# EAGLE board MAIN BOARD fat outline (EAGLE 5.11)
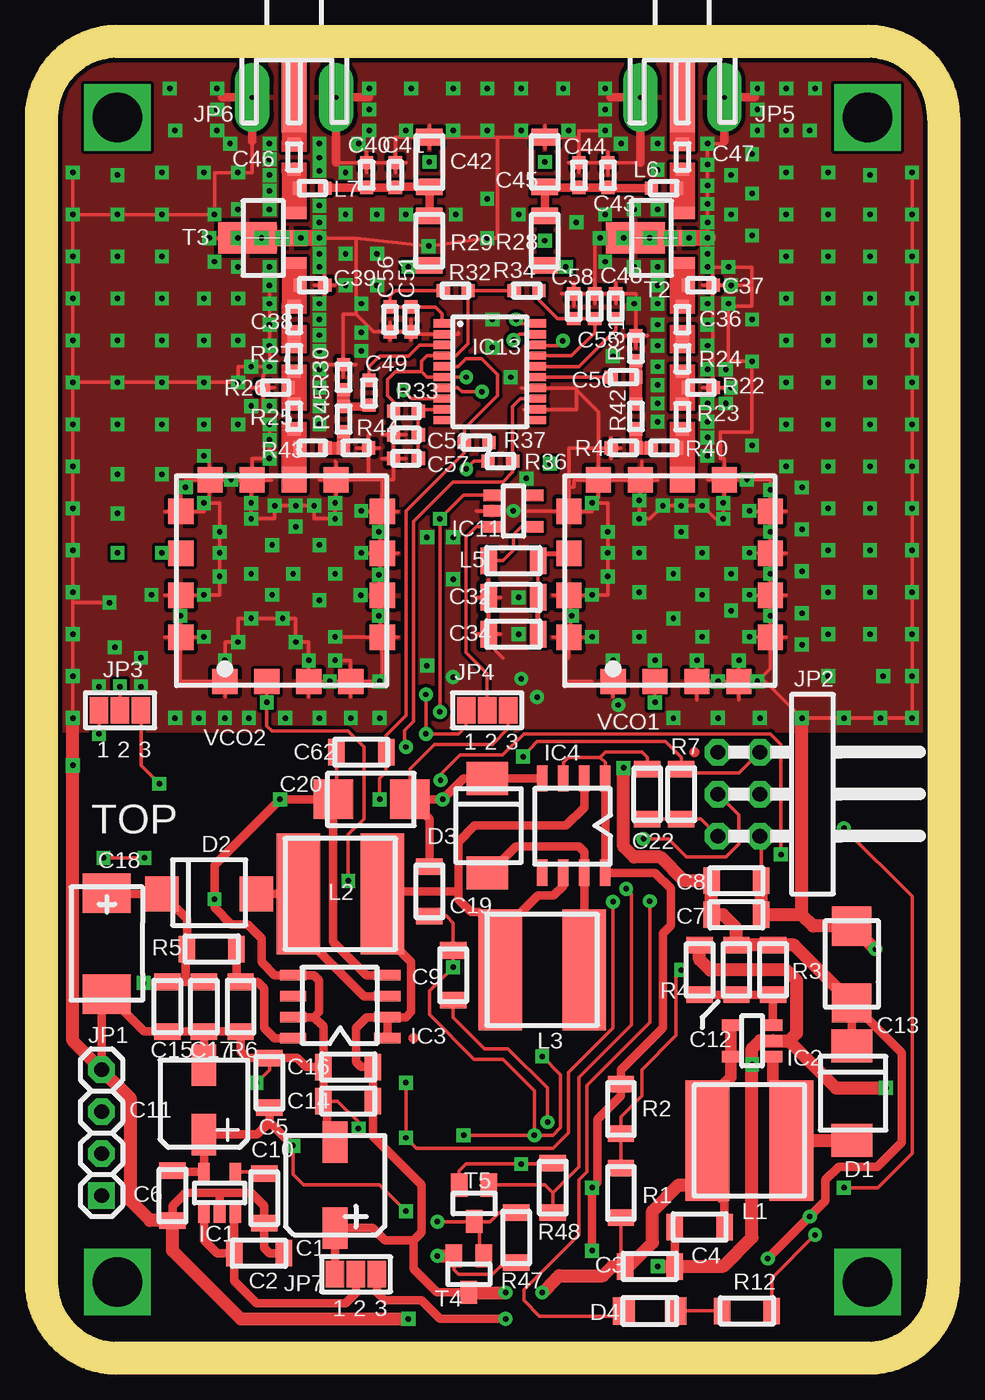
[diagram p0: board, top side]
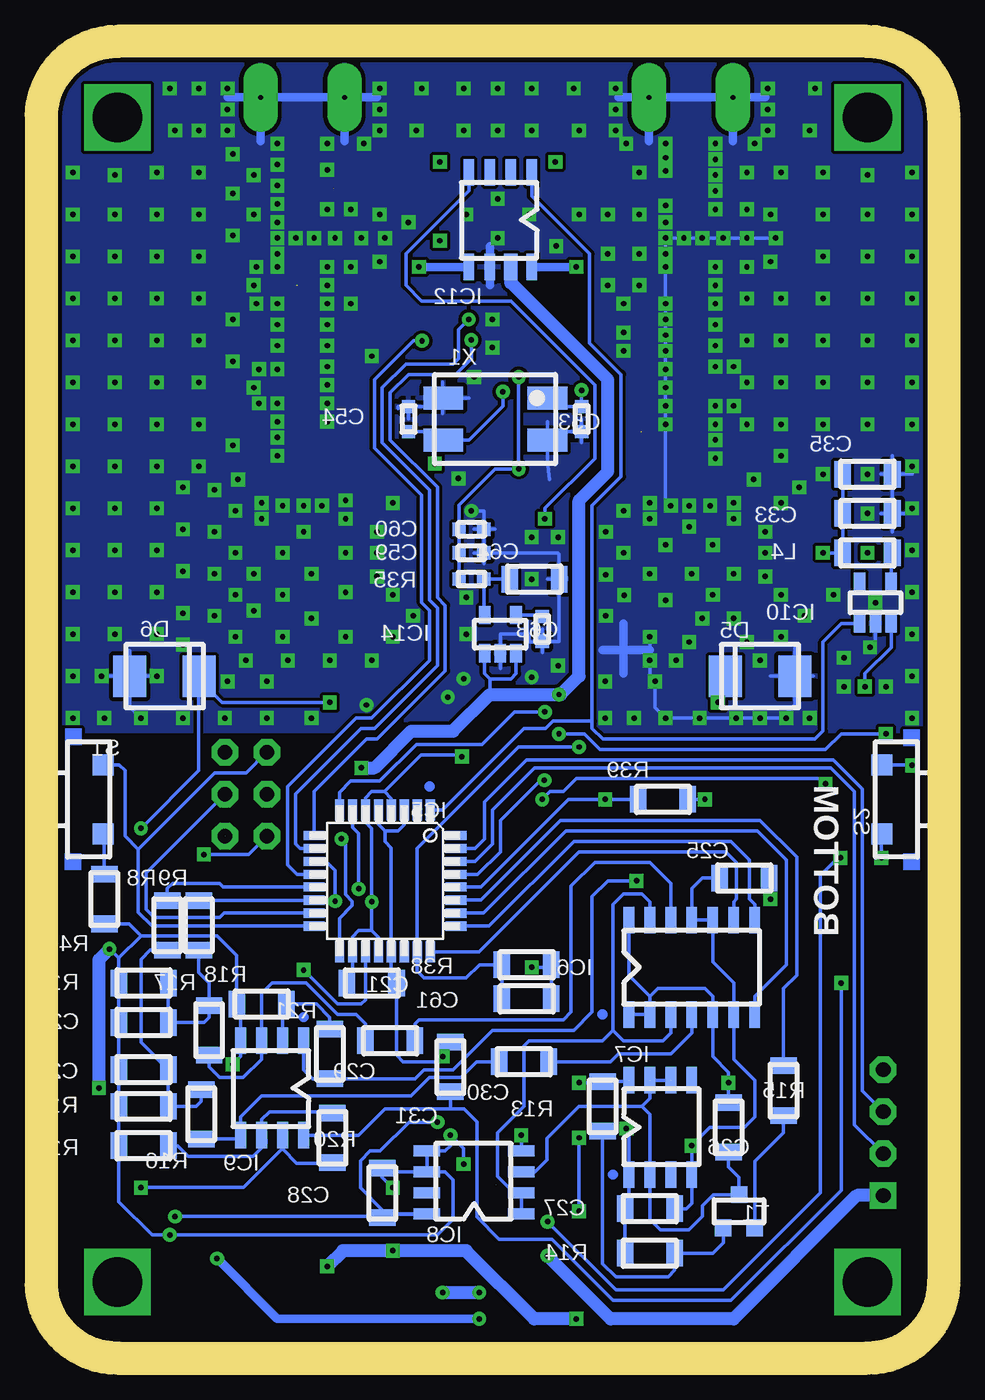
[diagram p1: board, bottom side, seen from below]

Size 54.61 x 79.69 mm. Coordinates in mm from the lower left corner, seen from the top.
Outline: 0,75.09 0,4.6 arc90 4.6,0 50.01,0 arc90 54.61,4.6 54.61,75.09
Outline: 4.6,79.69 50.01,79.69
Outline: 4.6,79.69 arc90 0,75.09 arc-90 4.6,79.69
Outline: 54.61,75.09 arc90 50.01,79.69
Copper layers (1*16): Top 0.035mm / dielectric 1.5mm / Bottom 0.035mm
Design rules "SparkFun *": minimum track width 7mil, minimum drill 13mil, track to track 8mil, track to pad 8mil, pad to pad 8mil, via to via 8mil, smd to smd 8mil, copper to edge 10mil, drill to drill 8mil, minimum pad ring 12mil, minimum via ring 10mil, stop-mask expansion 4mil, vias tented up to drill 25mil, thermal gap 10mil

## Footprints (pad centres in the part's own frame; a part is rotated, then mirrored left to right if it is on the bottom)
C1 = smd 1.5 x 2.5: 1 0,-2.594; 2 0,2.594
C2 = smd 1 x 1.6: 1 -1.5,0; 2 1.5,0
C3 = smd 1 x 1.6: 1 -1.5,0; 2 1.5,0
C4 = smd 1 x 1.6: 1 1.5,0; 2 -1.5,0
C5 = smd 1.6 x 1: 1 0,-1.5; 2 0,1.5
C6 = smd 1.6 x 1: 1 0,1.5; 2 0,-1.5
C7 = smd 1 x 1.6: 1 -1.5,0; 2 1.5,0
C8 = smd 1 x 1.6: 1 -1.5,0; 2 1.5,0
C9 = smd 1.6 x 1: 1 0,-1.5; 2 0,1.5
C10 = smd 1.6 x 1: 1 0,1.5; 2 0,-1.5
C11 = smd 1.5 x 2.5: 1 0,-1.865; 2 0,2.341
C12 = smd 1.6 x 1: 1 0,1.5; 2 0,-1.5
C13 = smd 2.388 x 2.388: 1 0,-2.311; 2 0,2.337
C14 = smd 1 x 1.6: 1 1.5,0; 2 -1.5,0
C15 = smd 1.6 x 1: 1 0,1.5; 2 0,-1.5
C16 = smd 1 x 1.6: 1 1.5,0; 2 -1.5,0
C17 = smd 1.6 x 1: 1 0,1.5; 2 0,-1.5
C18 = smd 2.896 x 2.388: 1 0,3.048; 2 0,-3.048
C19 = smd 1.6 x 1: 1 0,1.5; 2 0,-1.5
C20 = smd 2.388 x 2.388: 1 2.311,0; 2 -2.337,0
C21 = smd 1 x 1.6 bottom: 1 1.5,0; 2 -1.5,0
C22 = smd 1.6 x 1: 1 0,-1.5; 2 0,1.5
C23 = smd 1 x 1.6 bottom: 1 1.5,0; 2 -1.5,0
C24 = smd 1 x 1.6 bottom: 1 -1.5,0; 2 1.5,0
C25 = smd 1 x 1.6 bottom: 1 1.5,0; 2 -1.5,0
C26 = smd 1.6 x 1 bottom: 1 0,-1.5; 2 0,1.5
C27 = smd 1 x 1.6 bottom: 1 -1.5,0; 2 1.5,0
C28 = smd 1.6 x 1 bottom: 1 0,-1.5; 2 0,1.5
C29 = smd 1 x 1.6 bottom: 1 -1.5,0; 2 1.5,0
C30 = smd 1 x 1.6 bottom: 1 -1.5,0; 2 1.5,0
C31 = smd 1.6 x 1 bottom: 1 0,-1.5; 2 0,1.5
C32 = smd 1 x 1.6: 1 1.5,0; 2 -1.5,0
C33 = smd 1 x 1.6 bottom: 1 1.5,0; 2 -1.5,0
C34 = smd 1 x 1.6: 1 1.5,0; 2 -1.5,0
C35 = smd 1 x 1.6 bottom: 1 1.5,0; 2 -1.5,0
C36 = smd 0.8 x 0.8: 1 0,-0.75; 2 0,0.75
C37 = smd 0.8 x 0.8: 1 -0.75,0; 2 0.75,0
C38 = smd 0.8 x 0.8: 1 0,-0.75; 2 0,0.75
C39 = smd 0.8 x 0.8: 1 -0.75,0; 2 0.75,0
C40 = smd 0.8 x 0.8: 1 0,0.75; 2 0,-0.75
C41 = smd 0.8 x 0.8: 1 0,0.75; 2 0,-0.75
C42 = smd 1.6 x 1: 1 0,1.5; 2 0,-1.5
C43 = smd 0.8 x 0.8: 1 0,-0.75; 2 0,0.75
C44 = smd 0.8 x 0.8: 1 0,-0.75; 2 0,0.75
C45 = smd 1.6 x 1: 1 0,-1.5; 2 0,1.5
C46 = smd 0.8 x 0.8: 1 0,-0.75; 2 0,0.75
C47 = smd 0.8 x 0.8: 1 0,-0.75; 2 0,0.75
C48 = smd 0.8 x 0.8: 1 0,0.75; 2 0,-0.75
C49 = smd 0.8 x 0.8: 1 0,-0.75; 2 0,0.75
C50 = smd 0.8 x 0.8: 1 0.75,0; 2 -0.75,0
C51 = smd 0.8 x 0.8: 1 0,-0.75; 2 0,0.75
C52 = smd 0.8 x 0.8: 1 -0.75,0; 2 0.75,0
C53 = smd 0.8 x 0.8 bottom: 1 0,0.75; 2 0,-0.75
C54 = smd 0.8 x 0.8 bottom: 1 0,0.75; 2 0,-0.75
C55 = smd 0.8 x 0.8: 1 0,0.75; 2 0,-0.75
C56 = smd 0.8 x 0.8: 1 0,-0.75; 2 0,0.75
C57 = smd 0.8 x 0.8: 1 -0.75,0; 2 0.75,0
C58 = smd 0.8 x 0.8: 1 0,0.75; 2 0,-0.75
C59 = smd 0.8 x 0.8 bottom: 1 -0.75,0; 2 0.75,0
C60 = smd 0.8 x 0.8 bottom: 1 -0.75,0; 2 0.75,0
C61 = smd 1 x 1.6 bottom: 1 1.5,0; 2 -1.5,0
C62 = smd 1 x 1.6: 1 1.5,0; 2 -1.5,0
C63 = smd 0.8 x 0.8 bottom: 1 0,-0.75; 2 0,0.75
C64 = smd 1 x 1.6 bottom: 1 1.5,0; 2 -1.5,0
D1 = smd 2.5 x 2: 1 0,-2.856; 2 0,2.859
D2 = smd 2 x 2.1: 1 2.856,0; 2 -2.859,0
D3 = smd 2.5 x 2: 1 0,-2.856; 2 0,2.859
D4 = smd 1.315 x 1.68: 1 -1.568,0; 2 1.568,0
D5 = smd 2 x 2.5 bottom: 1 -2.1,0; 2 2.1,0
D6 = smd 2 x 2.5 bottom: 1 2.1,0; 2 -2.1,0
IC1 = smd 0.7 x 1.1: 1 -0.953,-1.27; 2 -0.001,-1.27; 3 0.951,-1.27; 4 0.952,1.27; 5 -0.954,1.27
IC2 = smd 1.1 x 0.7: 1 1.27,-0.953; 2 1.27,-0.001; 3 1.27,0.951; 4 -1.27,0.952; 5 -1.27,-0.954
IC3 = smd 1.6 x 0.65: 1 0,0; 2 0,1.27; 3 0,2.54; 4 0,3.81; 5 -5.715,3.81; 6 -5.715,2.54; 7 -5.715,1.27; 8 -5.715,0
IC4 = smd 0.65 x 1.6: 1 0,0; 2 -1.27,0; 3 -2.54,0; 4 -3.81,0; 5 -3.81,-5.715; 6 -2.54,-5.715; 7 -1.27,-5.715; 8 0,-5.715
IC5 = smd 0.559 x 1.27 bottom: 1 -2.743,4.293; 2 -1.956,4.293; 3 -1.168,4.293; 4 -0.381,4.293; 5 0.381,4.293; 6 1.168,4.293; 7 1.956,4.293; 8 2.743,4.293; 17 2.743,-4.293; 18 1.956,-4.293; 19 1.168,-4.293; 20 0.381,-4.293; 21 -0.381,-4.293; 22 -1.168,-4.293; 23 -1.956,-4.293; 24 -2.743,-4.293 | smd 1.27 x 0.559 bottom: 9 4.293,2.743; 10 4.293,1.956; 11 4.293,1.168; 12 4.293,0.381; 13 4.293,-0.381; 14 4.293,-1.168; 15 4.293,-1.956; 16 4.293,-2.743; 25 -4.293,-2.743; 26 -4.293,-1.956; 27 -4.293,-1.168; 28 -4.293,-0.381; 29 -4.293,0.381; 30 -4.293,1.168; 31 -4.293,1.956; 32 -4.293,2.743
IC6 = smd 0.65 x 1.6 bottom: 1 0,0; 2 -1.27,0; 3 -2.54,0; 4 -3.81,0; 5 -5.08,0; 6 -6.35,0; 7 -7.62,0; 8 -7.62,5.715; 9 -6.35,5.715; 10 -5.08,5.715; 11 -3.81,5.715; 12 -2.54,5.715; 13 -1.27,5.715; 14 0,5.715
IC7 = smd 0.65 x 1.6 bottom: 1 0,0; 2 -1.27,0; 3 -2.54,0; 4 -3.81,0; 5 -3.81,5.715; 6 -2.54,5.715; 7 -1.27,5.715; 8 0,5.715
IC8 = smd 1.6 x 0.65 bottom: 1 0,0; 2 0,1.27; 3 0,2.54; 4 0,3.81; 5 5.715,3.81; 6 5.715,2.54; 7 5.715,1.27; 8 5.715,0
IC9 = smd 0.65 x 1.6 bottom: 1 0,0; 2 1.27,0; 3 2.54,0; 4 3.81,0; 5 3.81,-5.715; 6 2.54,-5.715; 7 1.27,-5.715; 8 0,-5.715
IC10 = smd 0.7 x 1.1 bottom: 1 0.953,-1.27; 2 0.001,-1.27; 3 -0.951,-1.27; 4 -0.952,1.27; 5 0.954,1.27
IC11 = smd 1.1 x 0.7: 1 -1.27,0.953; 2 -1.27,0.001; 3 -1.27,-0.951; 4 1.27,-0.952; 5 1.27,0.954
IC12 = smd 0.65 x 1.6 bottom: 1 0,0; 2 1.27,0; 3 2.54,0; 4 3.81,0; 5 3.81,-5.715; 6 2.54,-5.715; 8 0,-5.715 | smd 0.8 x 1.6 bottom: 7 1.27,-5.715
IC13 = smd 1 x 0.5: 1 -2.9,2.925; 2 -2.9,2.275; 3 -2.9,1.625; 4 -2.9,0.975; 5 -2.9,0.325; 6 -2.9,-0.325; 7 -2.9,-0.975; 8 -2.9,-1.625; 9 -2.9,-2.275; 10 -2.9,-2.925; 11 2.9,-2.925; 12 2.9,-2.275; 13 2.9,-1.625; 14 2.9,-0.975; 15 2.9,-0.325; 16 2.9,0.325; 17 2.9,0.975; 18 2.9,1.625; 19 2.9,2.275; 20 2.9,2.925
IC14 = smd 0.7 x 1.1 bottom: 1 0.95,-1.15; 2 0.001,-1.15; 3 -0.95,-1.15; 4 -0.95,1.15; 5 0.95,1.15
JP1 = drill 0.9 pad 1.6 square: 1 0,0 | drill 0.9 pad 1.6 octagon: 2 0,2.54; 3 0,5.08; 4 0,7.62
JP2 = drill 0.9 pad 1.6 octagon: 1 0,0; 2 2.54,0; 3 0,-2.54; 4 2.54,-2.54; 5 0,-5.08; 6 2.54,-5.08
JP3 = smd 1.12 x 1.6: 1 -1.27,0; 2 0,0; 3 1.27,0
JP4 = smd 1.12 x 1.6: 1 -1.27,0; 2 0,0; 3 1.27,0
JP5 = drill 0.3 pad 2.096 long: 1 -2.54,-2.286; 3 2.54,-2.286 | smd 1.524 x 4.191: 2 0,-2.286
JP6 = drill 0.3 pad 2.096 long: 1 -2.54,-2.286; 3 2.54,-2.286 | smd 1.524 x 4.191: 2 0,-2.286
JP7 = smd 1.12 x 1.6: 1 -1.27,0; 2 0,0; 3 1.27,0
L1 = smd 2.65 x 7.3: 1 0,0; 2 5.08,0
L2 = smd 2.65 x 7.3: 1 0,0; 2 -5.08,0
L3 = smd 2.65 x 7.3: 1 0,0; 2 5.08,0
L4 = smd 1 x 1.6 bottom: 1 1.5,0; 2 -1.5,0
L5 = smd 1 x 1.6: 1 1.5,0; 2 -1.5,0
L6 = smd 0.8 x 0.8: 1 0.75,0; 2 -0.75,0
L7 = smd 0.8 x 0.8: 1 -0.75,0; 2 0.75,0
R1 = smd 1.6 x 1: 1 0,-1.5; 2 0,1.5
R2 = smd 1.6 x 1: 1 0,-1.5; 2 0,1.5
R3 = smd 1.6 x 1: 1 0,1.5; 2 0,-1.5
R4 = smd 1.6 x 1: 1 0,-1.5; 2 0,1.5
R5 = smd 1 x 1.6: 1 -1.5,0; 2 1.5,0
R6 = smd 1.6 x 1: 1 0,1.5; 2 0,-1.5
R7 = smd 1.6 x 1: 1 0,1.5; 2 0,-1.5
R8 = smd 1.6 x 1 bottom: 1 0,1.5; 2 0,-1.5
R9 = smd 1.6 x 1 bottom: 1 0,1.5; 2 0,-1.5
R10 = smd 1 x 1.6 bottom: 1 -1.5,0; 2 1.5,0
R11 = smd 1 x 1.6 bottom: 1 1.5,0; 2 -1.5,0
R12 = smd 1 x 1.6: 1 1.5,0; 2 -1.5,0
R13 = smd 1.6 x 1 bottom: 1 0,1.5; 2 0,-1.5
R14 = smd 1 x 1.6 bottom: 1 -1.5,0; 2 1.5,0
R15 = smd 1.6 x 1 bottom: 1 0,1.5; 2 0,-1.5
R16 = smd 1.6 x 1 bottom: 1 0,-1.5; 2 0,1.5
R17 = smd 1.6 x 1 bottom: 1 0,-1.5; 2 0,1.5
R18 = smd 1 x 1.6 bottom: 1 -1.5,0; 2 1.5,0
R19 = smd 1 x 1.6 bottom: 1 -1.5,0; 2 1.5,0
R20 = smd 1.6 x 1 bottom: 1 0,-1.5; 2 0,1.5
R21 = smd 1.6 x 1 bottom: 1 0,-1.5; 2 0,1.5
R22 = smd 0.8 x 0.8: 1 -0.75,0; 2 0.75,0
R23 = smd 0.8 x 0.8: 1 0,-0.75; 2 0,0.75
R24 = smd 0.8 x 0.8: 1 0,-0.75; 2 0,0.75
R25 = smd 0.8 x 0.8: 1 0,0.75; 2 0,-0.75
R26 = smd 0.8 x 0.8: 1 0.75,0; 2 -0.75,0
R27 = smd 0.8 x 0.8: 1 0,0.75; 2 0,-0.75
R28 = smd 1.6 x 1: 1 0,1.5; 2 0,-1.5
R29 = smd 1.6 x 1: 1 0,1.5; 2 0,-1.5
R30 = smd 0.8 x 0.8: 1 0,-0.75; 2 0,0.75
R31 = smd 0.8 x 0.8: 1 0,-0.75; 2 0,0.75
R32 = smd 0.8 x 0.8: 1 0.75,0; 2 -0.75,0
R33 = smd 0.8 x 0.8: 1 -0.75,0; 2 0.75,0
R34 = smd 0.8 x 0.8: 1 -0.75,0; 2 0.75,0
R35 = smd 0.8 x 0.8 bottom: 1 0.75,0; 2 -0.75,0
R36 = smd 0.8 x 0.8: 1 -0.75,0; 2 0.75,0
R37 = smd 0.8 x 0.8: 1 0.75,0; 2 -0.75,0
R38 = smd 1 x 1.6 bottom: 1 1.5,0; 2 -1.5,0
R39 = smd 1 x 1.6 bottom: 1 1.5,0; 2 -1.5,0
R40 = smd 0.8 x 0.8: 1 -0.75,0; 2 0.75,0
R41 = smd 0.8 x 0.8: 1 0.75,0; 2 -0.75,0
R42 = smd 0.8 x 0.8: 1 0,0.75; 2 0,-0.75
R43 = smd 0.8 x 0.8: 1 0.75,0; 2 -0.75,0
R44 = smd 0.8 x 0.8: 1 -0.75,0; 2 0.75,0
R45 = smd 0.8 x 0.8: 1 0,0.75; 2 0,-0.75
R46 = smd 1.6 x 1 bottom: 1 0,1.5; 2 0,-1.5
R47 = smd 1.6 x 1: 1 0,1.5; 2 0,-1.5
R48 = smd 1.6 x 1: 1 0,-1.5; 2 0,1.5
S1 = smd 1.27 x 1.27 bottom: 1 -0.885,2.1; 2 -0.885,-2.1
S2 = smd 1.27 x 1.27 bottom: 1 0.885,-2.1; 2 0.885,2.1
T1 = smd 1 x 1 bottom: 1 0.95,-1; 2 -0.95,-1; 3 0,1
T2 = smd 1.524 x 0.711: 1 2.2,-1.5; 3 2.2,1.5 | smd 1.85 x 0.965: 2 2.037,0 | smd 3.556 x 1.905: 4 -0.635,0
T3 = smd 1.524 x 0.711: 1 2.2,-1.5; 3 2.2,1.5 | smd 1.85 x 0.965: 2 2.037,0 | smd 3.556 x 1.905: 4 -0.635,0
T4 = smd 1 x 1.4: 1 0.9,1.111; 2 -0.9,1.111; 3 0,-1.089
T5 = smd 1 x 1.4: 1 0.9,1.111; 2 -0.9,1.111; 3 0,-1.089
VCO1 = smd 1.524 x 1.524: 1 0,0; 2 2.54,0; 3 5.08,0; 4 7.62,0; 5 9.525,2.667; 6 9.525,5.207; 7 9.525,7.747; 8 9.525,10.287; 9 6.731,12.192; 10 4.191,12.192; 11 1.651,12.192; 12 -0.889,12.192; 13 -2.667,10.287; 14 -2.667,7.747; 15 -2.667,5.207; 16 -2.667,2.667
VCO2 = smd 1.524 x 1.524: 1 0,0; 2 2.54,0; 3 5.08,0; 4 7.62,0; 5 9.525,2.667; 6 9.525,5.207; 7 9.525,7.747; 8 9.525,10.287; 9 6.731,12.192; 10 4.191,12.192; 11 1.651,12.192; 12 -0.889,12.192; 13 -2.667,10.287; 14 -2.667,7.747; 15 -2.667,5.207; 16 -2.667,2.667
X1 = smd 2.4 x 1.4 bottom: 1 0,0; 2 0,-2.54; 3 6.3,-2.54; 4 6.3,0

## Placement (x,y rotation side)
C1  100u/6.3V  [C1]  17.78,10.48 0 top
C2  100n  [C2]  13.18,6.35 0 top
C3  100n  [C3]  36.83,5.56 0 top
C4  1u  [C4]  39.85,7.94 0 top
C5  1u  [C5]  13.81,16.67 0 top
C6  100n  [C6]  7.94,9.84 0 top
C7  100n  [C7]  42.07,26.83 0 top
C8  1u  [C8]  42.07,28.89 0 top
C9  100n  [C9]  24.92,23.18 0 top
C10  10n  [C10]  13.49,9.68 0 top
C11  100u/4V  [C11]  9.84,15.4 0 top
C12  470p  [C12]  42.07,23.5 0 top
C13  100u/10V  [C13]  49.05,23.81 0 top
C14  1u  [C14]  18.57,15.56 0 top
C15  1u  [C15]  7.62,21.27 0 top
C16  100n  [C16]  18.57,17.62 0 top
C17  100n  [C17]  9.84,21.27 0 top
C18  22u/35V  [C18]  3.97,25.08 0 top
C19  100n  [C19]  23.5,28.26 0 top
C20  68u/16V  [C20]  20,33.81 0 top
C21  100n  [C21]  34.61,22.7 0 top
C22  100n  [C22]  36.67,34.13 0 top
C23  4.7u  [C23]  48.42,17.46 0 top
C24  4.7u  [C24]  48.42,20.32 0 top
C25  100n  [C25]  12.06,29.05 0 top
C26  100n  [C26]  13.02,13.97 0 top
C27  100n  [C27]  17.78,9.05 0 top
C28  100n  [C28]  33.97,10 0 top
C29  4.7u  [C29]  33.5,19.21 0 top
C30  4.7u  [C30]  25.4,17.94 0 top
C31  100n  [C31]  29.84,17.62 0 top
C32  100n  [C32]  28.57,46.04 0 top
C33  100n  [C33]  4.6,51.12 0 top
C34  1u  [C34]  28.57,43.81 0 top
C35  1u  [C35]  4.6,53.5 0 top
C36  68p  [C36]  38.8,62.87 0 top
C37  *  [C37]  39.91,64.93 0 top
C38  100p  [C38]  15.3,62.87 0 top
C39  *  [C39]  16.41,64.93 0 top
C40  68p  [C40]  19.68,71.6 0 top
C41  1000p  [C41]  21.43,71.6 0 top
C42  1u  [C42]  23.5,72.39 0 top
C43  22p  [C43]  34.29,71.6 0 top
C44  1000p  [C44]  32.54,71.6 0 top
C45  1u  [C45]  30.48,72.39 0 top
C46  100p  [C46]  15.3,72.71 0 top
C47  68p  [C47]  38.8,72.71 0 top
C48  100p  [C48]  34.77,63.66 0 top
C49  100p  [C49]  19.84,58.42 0 top
C50  100p  [C50]  35.24,59.37 0 top
C51  100p  [C51]  22.38,62.87 0 top
C52  100p  [C52]  22.07,55.88 0 top
C53  22p  [C53]  21.91,56.83 0 top
C54  22p  [C54]  32.38,56.83 0 top
C55  100p  [C55]  33.5,63.66 0 top
C56  10n  [C56]  21.11,62.87 0 top
C57  10n  [C57]  22.07,54.45 0 top
C58  10n  [C58]  32.23,63.66 0 top
C59  100n  [C59]  28.57,48.74 0 top
C60  1u  [C60]  28.57,50.16 0 top
C61  100n  [C61]  25.24,21.75 0 top
C62  100n  [C62]  19.37,36.67 0 top
C63  10n  [C63]  24.29,44.13 0 top
C64  1u  [C64]  24.77,47.15 0 top
D1  SS14  [D1]  49.05,16.03 0 top
D2  SS14  [D2]  10.16,28.1 0 top
D3  SS14  [D3]  26.99,32.23 0 top
D4  GREEN  [D4]  36.83,2.86 0 top
D5  SMAZ22-13-F  [D5]  11.11,41.27 0 top
D6  SMAZ22-13-F  [D6]  47.15,41.27 0 top
IC1  TPS79333  [IC1]  10.79,10 0 top
IC2  LM2731Y  [IC2]  43.02,19.21 0 top
IC3  LT1173CS8  [IC3]  20.95,19.37 0 top
IC4  LT1301CS8  [IC4]  34.13,35.08 0 top
IC5  ATMEGA168-10V  [IC5]  33.81,28.89 0 top
IC6  AD8402ARZ10  [IC6]  19.05,20.8 0 top
IC7  NE555D  [IC7]  19.05,11.11 0 top
IC8  LM358D  [IC8]  25.56,8.73 0 top
IC9  LM358D  [IC9]  38.73,19.21 0 top
IC10  MIC2514  [IC10]  4.13,45.72 0 top
IC11  MIC2514  [IC11]  28.57,51.28 0 top
IC12  MIC2506YM  [IC12]  24.92,71.75 0 top
IC13  LMX2433  [IC13]  27.15,59.69 0 top
IC14  LP2985AIM5-2.5CT  [IC14]  26.83,43.81 0 top
JP1  USB/Batt Board  [JP1]  3.65,9.84 0 top
JP2  ISP  [JP2]  40.96,36.67 0 top
JP3  VCO voltage select  [JP3]  4.76,39.21 0 top
JP4  VCO Voltage select  [JP4]  26.99,39.21 0 top
JP5  SMA J629-ND  [JP5]  38.8,78.58 0 top
JP6  SMA J629-ND  [JP6]  15.3,78.58 0 top
JP7  3.3V supply select  [JP7]  19.05,5.08 0 top
L1  7.3uH  [L1]  40.32,13.18 0 top
L2  33uH  [L2]  20.64,28.1 0 top
L3  33uH  [L3]  27.78,23.5 0 top
L4  FERRIT  [L4]  4.6,48.74 0 top
L5  FERRIT  [L5]  28.57,48.26 0 top
L6  22nH  [L6]  37.68,70.8 0 top
L7  33nH  [L7]  16.41,70.8 0 top
R1  510K  [R1]  35.08,10 0 top
R2  330K  [R2]  35.08,15.08 0 top
R3  47K  [R3]  44.29,23.5 0 top
R4  13K  [R4]  39.85,23.5 0 top
R5  820K  [R5]  10.32,24.77 0 top
R6  50K  [R6]  12.06,21.27 0 top
R7  10K  [R7]  38.73,34.13 0 top
R8  1K  [R8]  46.99,26.19 0 top
R9  1K  [R9]  45.09,26.19 0 top
R10  *  [R10]  48.42,22.7 0 top
R11  *  [R11]  48.42,15.24 0 top
R12  750  [R12]  42.7,2.86 0 top
R13  10K  [R13]  20.64,15.24 0 top
R14  20K  [R14]  17.78,6.35 0 top
R15  68  [R15]  9.68,16.19 0 top
R16  10K  [R16]  44.93,14.76 0 top
R17  10K  [R17]  44.45,19.84 0 top
R18  10K  [R18]  41.27,21.43 0 top
R19  10K  [R19]  48.42,12.86 0 top
R20  30K(47K)  [R20]  36.99,13.34 0 top
R21  30K(47K)  [R21]  37.15,18.41 0 top
R22  *  [R22]  39.91,58.74 0 top
R23  0  [R23]  38.8,56.99 0 top
R24  0  [R24]  38.8,60.48 0 top
R25  0  [R25]  15.3,56.99 0 top
R26  *  [R26]  14.19,58.74 0 top
R27  0  [R27]  15.3,60.48 0 top
R28  1  [R28]  30.48,67.63 0 top
R29  1  [R29]  23.5,67.63 0 top
R30  50  [R30]  18.3,59.37 0 top
R31  50  [R31]  35.99,61.12 0 top
R32  18  [R32]  25.08,64.61 0 top
R33  18  [R33]  22.07,57.31 0 top
R34  18  [R34]  29.37,64.61 0 top
R35  18  [R35]  28.57,47.15 0 top
R36  10K  [R36]  27.78,54.29 0 top
R37  10K  [R37]  26.35,55.4 0 top
R38  10K  [R38]  25.24,23.81 0 top
R39  10K  [R39]  16.99,33.81 0 top
R40  10  [R40]  37.68,55.09 0 top
R41  120  [R41]  35.24,55.09 0 top
R42  10  [R42]  35.99,56.99 0 top
R43  22  [R43]  16.41,55.09 0 top
R44  47  [R44]  19.05,55.09 0 top
R45  22  [R45]  18.3,56.83 0 top
R46  100  [R46]  50.8,27.78 0 top
R47  100K  [R47]  28.73,7.3 0 top
R48  100K  [R48]  30.96,10.32 0 top
S1  Cycle Program  [S1]  51.75,33.81 0 top
S2  Power ON  [S2]  2.86,33.81 0 top
T1  MMBT3906  [T1]  12.38,8.89 0 top
T2  GALI-84 / SGA-7489Z  [T2]  36.6,67.79 0 top
T3  GALI-84 / SGA-7489Z  [T3]  13.1,67.79 0 top
T4  FDN302P  [T4]  25.88,5.08 0 top
T5  FDV303N  [T5]  26.19,9.37 0 top
VCO1  ROS-2700-1819  [VCO1]  34.61,40.96 0 top
VCO2  ROS-1300  [VCO2]  11.11,40.96 0 top
X1  10MHz  [X1]  23.97,58.1 0 top

## Library data of the parts
C1-C64 D1-D6 IC1-IC14 JP1-JP7 L1-L7 R1-R48 S1 S2 T1-T5 VCO1 VCO2 X1 = wave_bubble-main_new_Power_Switch_v2

## Nets
1: JP1.1 R47.2 T4.2
2: D1.1 IC2.1 L1.2
3: IC5.31 JP1.3
3.3V: C5.1 C6.1 C11.1 C21.1 C25.1 C27.1 IC1.5 IC5.4 IC5.6 IC5.18 IC5.20 IC6.6 IC6.10 IC6.11 IC7.4 IC7.8 JP2.2 R7.1 R13.1
5V: C7.1 C8.1 C9.1 C12.1 C13.1 C28.1 D1.2 IC8.8 IC12.7 IC14.1 IC14.3 JP3.1 JP4.1 JP7.3 R3.1
12V: C19.1 C20.1 D3.2 IC4.4 JP3.3 JP4.3
24V: C15.1 C17.1 C18.1 C31.1 D2.2 IC9.8 R5.1
+: C30.2 IC9.5 R16.1
BYPASS: C10.1 IC1.4
CLK: IC5.24 IC6.9
CPOUTRF: C61.1 IC5.23 IC13.13 R36.2 R38.1
CS: IC5.26 IC6.7
CTLA: IC5.1 IC10.1 IC12.1
CTLB: IC5.8 IC11.1 IC12.4
DATA: IC5.10 IC13.20
FB: C12.2 IC2.3 R3.2 R4.1
FINRF#: C48.2 IC13.16
G: R47.1 S2.1 T4.1 T5.3
GND: C1.2 C2.2 C3.2 C4.2 C5.2 C6.2 C7.2 C8.2 C9.2 C10.2 C11.2 C13.2 C14.2 C15.2 C16.2 C17.2 C18.2 C19.2 C20.2 C21.2 C22.2 C23.1 C24.2 C25.2 C26.2 C27.2 C28.2 C31.2 C32.2 C33.2 C34.2 C35.2 C37.2 C39.2 C40.1 C41.1 C42.1 C43.2 C44.2 C45.2 C48.1 C51.1 C52.1 C53.2 C54.1 C55.1 C56.1 C57.1 C58.1 C59.1 C60.1 C61.2 C62.2 C63.1 C64.2 D5.1 D6.1 IC1.2 IC2.2 IC3.4 IC3.5 IC3.7 IC4.1 IC4.3 IC4.8 IC5.3 IC5.5 IC5.21 IC6.1 IC6.2 IC6.5 IC6.14 IC7.1 IC8.4 IC8.5 IC8.6 IC9.4 IC10.2 IC11.2 IC12.6 IC13.2 IC13.12 IC13.14 IC14.2 JP1.4 JP2.6 JP5.1 JP5.3 JP6.1 JP6.3 R2.2 R4.2 R6.2 R10.2 R11.1 R12.1 R14.2 R18.2 R19.2 R22.2 R26.2 R30.2 R31.2 R38.2 R39.2 R41.2 R44.2 R46.2 R48.2 S2.2 T2.2 T2.4 T3.2 T3.4 T5.2 VCO1.1 VCO1.3 VCO1.4 VCO1.5 VCO1.6 VCO1.7 VCO1.8 VCO1.9 VCO1.11 VCO1.12 VCO1.13 VCO1.15 VCO1.16 VCO2.1 VCO2.3 VCO2.4 VCO2.5 VCO2.6 VCO2.7 VCO2.8 VCO2.9 VCO2.11 VCO2.12 VCO2.13 VCO2.15 VCO2.16 X1.4
IN: IC10.3 JP3.2
LE: IC5.12 IC13.18
LOWBATT: IC5.19 R1.2 R2.1
MISO: IC5.16 JP2.1 S1.1
MOSI: IC5.15 JP2.4
OSCIN: C53.1 IC13.8 X1.1
OUT: IC6.3 IC6.13 IC8.1 IC8.2
OUTA: IC12.8 R29.2
OUTB: IC12.5 R28.2
PCI12/ADC4/SDA/PC4: IC5.27 R15.1
PCI13/ADC5/SCL/PC5: C62.1 IC5.28 IC13.5 R37.2 R39.1
PCI23/AIN1/PD7: D4.1 IC5.11
PIN3: C47.1 L6.1 T2.3
RESET: C22.1 IC5.29 JP2.5 R7.2
SCK: IC5.17 JP2.3
SDI: IC5.25 IC6.8
SIG$8: IC3.8 R5.2 R6.1
SIG$18: IC5.13 R8.1
SIG$19: IC5.14 R9.1
SIG$20: D4.2 R12.2
SIG$22: IC5.30 JP1.2
SIG$30: R13.2 R14.1 T1.1
SIG$31: R15.2 T1.2
SIG$34: C30.1 IC6.4
SIG$35: C29.1 IC6.12
SIG$37: C29.2 IC9.3 R17.1
SIG$39: IC9.6 R19.1 R20.2
SIG$40: IC9.2 R18.1 R21.2
SIG$41: D5.2 IC9.1 R21.1 VCO2.2
SIG$42: D6.2 IC9.7 R20.1 VCO1.2
SIG$44: C32.1 C34.1 L5.1 VCO1.14
SIG$45: IC11.4 L5.2
SIG$46: IC10.4 L4.2
SIG$48: IC11.3 JP4.2
SIG$51: C38.2 C39.1 T3.1
SIG$52: C36.2 C37.1 T2.1
SIG$55: C46.1 L7.1 T3.3
SIG$56: C40.2 C41.2 C42.2 L7.2 R29.1
SIG$57: C43.1 C44.1 C45.1 L6.2 R28.1
SIG$62: IC5.9 IC13.19
SIG$65: C49.2 IC13.3
SIG$66: C50.2 IC13.15
SIG$69: C51.2 C56.2 IC13.1 R32.2
SIG$70: C52.2 C57.2 IC13.9 R33.2
SIG$71: C55.2 C58.2 IC13.17 R34.2
SIG$72: C59.2 C60.2 IC13.4 IC13.6 R32.1 R33.1 R34.1 R35.1 R36.1 R37.1
SIG$73: C63.2 IC14.4
SIG$76: C47.2 JP5.2
SIG$77: C46.2 JP6.2
SIG$78: C54.2 IC13.7 X1.3
SIG$79: C2.1 IC1.1 IC1.3 JP7.2
SIG$80: R22.1 R23.2 R24.1
SIG$81: R25.1 R26.1 R27.2
SIG$82: C36.1 R24.2
SIG$83: R43.1 R44.1 R45.2
SIG$84: C49.1 R30.1 R45.1
SIG$85: R40.1 R41.1 R42.2
SIG$86: C50.1 R31.1 R42.1
SIG$87: C38.1 R27.1
SIG$88: R46.1 S1.2
SIG$90: IC5.7 R48.1 T5.1
SW: D3.1 IC4.7 L3.2
SW1: D2.1 IC3.3 L2.2
TRIG: C26.1 IC7.2 IC7.6 IC7.7 IC8.3 T1.3
VCC: C33.1 C35.1 L4.1 VCO2.14
VCO1_DCADJ: C23.2 R8.2 R11.2 R16.2
VCO1_OUT: R23.1 R40.2 VCO1.10
VCO2_DCADJ: C24.1 R9.2 R10.1 R17.2
VCO2_OUT: R25.2 R43.2 VCO2.10
VIN: C1.1 C3.1 C4.1 C14.1 C16.1 IC2.4 IC2.5 IC3.1 IC3.2 IC4.2 IC4.6 JP7.1 L1.1 L2.1 L3.1 R1.1 T4.3
VOUT: C64.1 IC14.5 R35.2

## Tracks (layer width: path | path; a pad name or v marks a point on that pad's centre or on a via)
1  (via drill 0.33 pad 0.25)
  Top 0.2: T4.2 24.98,5.34 25.24,5.08 27.3,5.08 27.78,5.56 28.49,5.56 R47.2
  Top 0.8: v23.97,6.19 T4.2
  Bottom 0.8: JP1.1 5.24,9.84 12.7,2.38 20.16,2.38 v23.97,6.19
2
  Top 0.5: L1.2 45.4,15.56 | D1.1
  Top 0.7: IC2.1 44.29,16.67 45.4,15.56
  Top 0.8: L1.2 D1.1
3
  Bottom 0.2: JP1.3 4.92,16.19 4.92,34.45 6.67,36.2 25.24,36.2 27.78,33.66 27.78,31.43 28.36,30.85 IC5.31
3.3V  (via drill 0.33)  (1 unrouted)
  Top 0.2: v22.07,16.67 v22.07,13.34 22.7,12.7 30.96,12.7 31.91,13.65 31.91,17.3 34.61,20 v34.61,27.61 | v22.07,8.89 20.48,10.48 15.88,10.48 IC7.4 v15.24,12.86 | JP2.2 42.23,35.4 38.97,35.4 R7.1 38.73,36.35 37.78,37.31 30,37.31 v29.16,36.41
  Top 0.5: C6.1 8.01,11.27 IC1.5 C11.1 13.06,13.53 13.81,14.29 | 13.81,14.29 C5.1 | 13.81,14.29 v15.24,12.86
  Bottom 0.2: IC5.4 33.43,33.88 33.85,34.29 | 33.85,34.29 34.61,34.29 34.98,33.91 IC5.6 34.98,32.44 34.61,32.07 v34.61,27.61 34.61,25.88 | IC5.20 34.2,25.46 34.61,25.88 | 34.61,25.88 35.4,25.88 35.77,25.51 IC5.18 35.77,23.04 C21.1 | IC7.8 19.14,16.74 R13.1 20.71,16.67 v22.07,16.67 | v22.07,8.89 v22.07,13.34 | C25.1 14.61,29.05 15.24,28.42 IC6.11 IC6.10 13.97,23.97 12.7,22.7 IC6.6 12.7,18.1 11.43,16.83 11.43,14.61 12.06,13.97 14.13,13.97 v15.24,12.86 IC7.4 15.24,9.37 15.56,9.05 C27.1 | 33.85,34.29 31.62,36.51 29.26,36.51 v29.16,36.41
  Bottom 0.5: IC5.20
5V  (via drill 0.33, 0.33 pad 0.25)
  Top 0.2: v30.64,14.29 30.64,16.35 28.26,18.73 26.83,18.73 24.92,20.64 C9.1 | JP4.1 25.72,38.26 25.24,37.78 v23.28,37.78 v23.28,40.16 | v3.49,37.78 JP3.1
  Top 0.5: v28.1,2.38 24.13,2.38 23.02,3.49 20.8,3.49 20.32,3.97 JP7.3 | D1.2 C13.1 52.07,18.48 52.07,13.07 50.59,11.59 48.26,11.59 47.47,10.79 47.47,9.53 v46.51,8.57 44.47,6.53 v43.97,6.03
  Top 0.8: v35.24,35.72 35.24,30.96 35.88,30.32 37.47,30.32 38.89,28.89 C8.1 C7.1 41.27,26.83 42.07,26.04 C12.1 R3.1 45.56,25 C13.1
  Bottom 0.2: IC14.3 25.88,41.43 26.19,41.12 27.46,41.12 | 27.46,41.12 27.78,41.43 IC14.1 | 27.46,40.16 27.46,41.12 | v23.28,37.78 21.75,37.78 20.8,36.83 7.14,36.83 6.19,37.78 v3.49,37.78 | 46.44,8.5 v46.51,8.57 34.68,8.57 34.55,8.7 31.3,8.7 IC8.8 33.73,8.73 33.97,8.97 | v30.64,14.29 32.36,14.29 34.1,12.55 34.7,12.55 35.3,11.95 35.3,10.3 33.97,8.97 | 33.97,8.97 C28.1
  Bottom 0.5: v28.1,2.38 40.32,2.38 v43.97,6.03
  Bottom 0.8: v35.24,35.72 34.45,35.72 32.23,37.94 29.69,37.94 27.46,40.16 v23.28,40.16 23.18,40.16 22.07,41.27 22.07,51.91 20.32,53.66 20.32,59.21 26.19,65.09 IC12.7
12V  (via drill 0.33)
  Top 0.2: C20.1 22.31,35.65 23.81,37.15 27.3,37.15 28.26,38.1 JP4.3 | v7.14,34.77 6.03,35.88 JP3.3
  Top 0.5: IC4.4 D3.2 25.56,35.09 v24.29,33.81 C20.1 23.5,32.63 C19.1
  Bottom 0.2: v24.29,33.81 23.81,34.29 23.02,34.29 22.23,35.08 7.46,35.08 v7.14,34.77
24V  (via drill 0.33)
  Top 0.2: v6.19,22.7 7.55,22.7 C15.1
  Top 0.5: C15.1 8.73,22.77 | C18.1 4,28.1 D2.2 8.82,26.58 R5.1 8.73,24.68 8.73,22.77 | 8.73,22.77 C17.1
  Bottom 0.2: 29.84,15.08 C31.1 | 29.84,15.08 33.81,15.08 35.4,13.49 IC9.8 | v6.19,22.7 6.19,10.16 12.86,3.49 20,3.49 23.71,7.2 26.9,7.2 28.25,8.55 28.25,14.3 29.03,15.08 29.84,15.08
+
  Bottom 0.2: C30.2 28.26,17.94 29.21,16.99 31.11,16.99 32.23,15.88 41.27,15.88 42.55,14.61 IC9.5 42.77,13.26 R16.1
BYPASS
  Top 0.2: IC1.4 13.41,11.27 C10.1
CLK
  Bottom 0.2: IC6.9 12.7,27.62 12.54,27.78 12.54,30 13.18,30.64 22.07,30.64 28.11,24.6 IC5.24
CPOUTRF  (via drill 0.33)
  Top 0.2: IC13.13 29.01,58.06 28.53,57.58 R36.2 28.53,53.61 27.94,53.02 24.92,53.02 22.54,50.64 22.54,38.54 22,38 22,37.05 v22.07,36.99
  Bottom 0.2: C61.1 R38.1 28.1,23.81 28.89,23.02 31.43,23.02 31.86,23.44 IC5.23 31.86,25 31.86,30.85 25.72,36.99 v22.07,36.99
CS  (1 unrouted)
  Bottom 0.2: IC6.7 11.43,21.91 9.53,23.81 9.53,30.16 11.27,31.91 22.86,31.91 27.83,26.94 IC5.26
CTLA
  Bottom 0.2: IC5.1 30.32,33.19 25.4,38.1 24.1,38.1 23.65,38.55 21.27,38.55 | IC10.1 6.19,44.45 7.3,43.34 7.3,37.94 7.78,37.47 20.61,37.47 21.27,38.12 21.27,38.55 | IC12.1 24.92,70.33 21.43,66.83 21.43,61.44 19.53,59.53 19.53,53.34 21.27,51.59 21.27,38.55
  Bottom 0.406: IC10.1
CTLB  (via drill 0.33)
  Top 0.2: v24.13,39.11 v24.13,50.8 25.56,52.23 IC11.1
  Bottom 0.2: IC5.8 36.56,34.25 35.88,34.92 34.13,34.92 31.91,37.15 27.94,37.15 25.98,39.11 v24.13,39.11 | IC12.4 28.73,70.64 32.54,66.83 32.54,64.93 31.59,63.98 26.19,63.98 21.11,58.9 21.11,54.45 24.13,51.44 v24.13,50.8
DATA  (via drill 0.33)
  Top 0.2: v28.73,62.87 28.98,62.62 IC13.20
  Bottom 0.2: IC5.10 38.95,30.85 39.21,31.11 39.21,34.13 35.24,38.1 34.45,38.1 30.64,41.91 30.64,45.4 31.11,45.88 31.11,52.55 33.97,55.4 33.97,58.74 32.54,60.17 29.69,60.17 29.37,60.48 29.37,62.23 v28.73,62.87
  Bottom 0.5: IC5.10
FB
  Top 0.5: R4.1 C12.2 R3.2 IC2.3
FINRF#
  Top 0.2: IC13.16 32.55,60.02 34.77,62.23 C48.2
G  (via drill 0.33, 0.33 pad 0.25)
  Top 0.2: 26.85,6.12 T4.1 26.51,6.46 26.51,7.96 T5.3 26.17,8.26 | v6.24,30.28 v3.76,30.28 | v23.97,8.26 26,8.26 26.17,8.26 | 26.17,8.26 27.15,8.26 27.69,8.8 R47.1
  Top 0.406: T5.3 26,8.28 26,8.26
  Bottom 0.2: S2.1 3.81,31.65 3.76,31.6 v3.76,30.28 | v23.97,8.26 19.84,4.13 13.34,4.13 7.46,10 7.46,29.21 6.39,30.28 v6.24,30.28
GND  (via drill 0.33, 0.33 pad 0.25)  (1 unrouted)
  Top 0.2: C19.2 24.52,26.76 24.92,26.35 C9.2 v24.92,23.65 23.5,22.23 23.5,20.8 26.19,18.1 27.94,18.1 29.84,16.19 v29.84,13.49 | IC4.1 34.13,36.04 33.81,36.35 | 33.81,36.35 31.91,36.35 31.59,36.04 IC4.3 | C62.2 17.87,34.02 C20.2 | v13.02,16.67 13.81,17.46 C5.2 | v29.84,13.49 v25.56,13.49 | 11.43,53.15 11.43,53.18 | v9.84,51.75 10.79,51.75 v10.79,50.01 v10.79,48.74 v10.79,47.31 10.79,46.2 v9.84,46.2 8.45,46.2 | 8.45,46.2 VCO2.15 8.41,46.2 | 8.41,43.62 VCO2.16 8.41,43.66 | 8.41,43.66 v8.41,44.93 8.41,46.2 | 8.41,43.66 v9.84,43.66 | 8.41,43.62 8.41,40.96 VCO2.1 | VCO2.1 v11.11,42.23 11.11,43.34 v11.91,43.34 11.91,44.77 v12.7,44.77 v14.61,44.77 15.4,44.77 v15.4,43.34 16.19,43.34 v16.19,42.23 VCO2.3 | VCO2.3 v17.46,40.96 VCO2.4 | 20.64,53.18 VCO2.8 | 20.64,48.74 v19.37,48.74 | VCO2.8 19.37,51.24 | 17.84,53.18 17.84,51.75 v17.78,51.75 v17.78,50.8 16.51,50.8 v16.51,51.59 v15.4,51.59 v14.13,51.59 14.13,50.8 v12.7,50.8 v12.7,51.75 12.7,53.02 | 20.64,43.66 v17.78,43.66 | VCO2.4 18.73,42.23 v17.78,42.23 | VCO2.5 20.95,43.66 | 34.92,53.15 VCO1.12 | VCO1.12 32.23,53.15 32.23,52.7 31.94,52.7 | 34.92,53.15 34.92,53.18 | 31.94,46.2 v33.34,46.2 34.29,46.2 v34.29,47.31 v34.29,48.74 v34.29,50.01 34.29,51.75 v33.34,51.75 33.34,51.24 VCO1.13 | 31.94,46.2 VCO1.15 31.91,46.2 | 31.91,43.62 VCO1.16 31.91,43.66 | 31.91,43.66 v32.11,44.93 31.91,46.2 | 31.91,43.66 v33.34,43.66 | 31.91,43.62 31.91,42.39 | 31.91,40.96 33.34,40.96 | v34.61,42.23 VCO1.1 34.61,40.01 | VCO1.3 v39.69,42.23 | VCO1.4 v40.96,40.96 VCO1.3 | VCO1.6 42.86,46.16 | 44.13,48.74 v42.86,48.74 | VCO1.8 42.86,51.24 v42.86,51.28 | 41.34,53.18 41.34,51.75 v41.27,51.75 v41.27,50.8 40.8,50.8 v40.01,51.59 v38.73,51.59 v37.62,51.59 36.83,50.8 v36.2,50.8 v36.2,51.91 36.26,51.91 VCO1.11
  Top 0.2: 44.13,43.66 v42.86,43.66 | VCO1.4 v42.23,42.23 | VCO1.5 44.45,43.66 | 8.41,43.66 8.41,43.62 | 20.64,43.66 v20.44,44.93 v20.44,47.42 20.64,48.74 | 20.64,48.74 v20.44,50.01 VCO2.8 | 31.91,43.66 31.91,43.62 | VCO1.6 v44.13,44.93 44.13,43.66 | VCO1.8 v44.13,50.01 44.13,48.74 | 41.34,53.18 v42.7,53.18 44.13,53.18 v44.13,52.55 44.13,51.28 | IC11.2 | 31.91,51.28 31.43,51.75 | 27.94,42.39 27.07,43.25 C34.2 | C34.2 C32.2 | v1.91,38.73 v1.91,41.27 v1.91,43.81 1.91,45.72 | VCO2.11 12.86,53.24 | C32.2 27.78,46.04 | C32.2 26.35,46.04 | C32.2 27.07,47.08 | C34.2 27.78,43.81 | C34.2 26.35,43.81 | v9.84,51.75 9.84,51.24 VCO2.13 | VCO2.13 8.45,52.7 v8.73,52.7 8.73,53.15 10.16,53.15 | VCO2.8 21.59,51.24 | 20.64,48.74 21.59,48.74 | 20.64,43.66 VCO2.5 | 20.64,43.66 20.95,43.66 | VCO2.4 18.73,40.01 | VCO2.3 16.19,40.01 | VCO2.1 11.11,40.01 | 8.41,43.66 7.46,43.66 | 8.45,46.2 8.41,46.2 | VCO2.13 7.46,51.24 | 11.43,53.15 10.16,53.15 | 10.16,53.15 10.16,52.07 v9.84,51.75 | 10.16,53.15 10.16,54.13 | 31.94,52.7 VCO1.13 | VCO1.12 33.72,52.07 33.66,52.07 | 41.34,53.18 41.34,54.45 41.12,54.45 41.12,56.04 43.02,56.04 v43.02,60.33 41.59,60.33 41.59,63.66 43.02,63.66 43.02,64.93 | 44.13,51.28 45.09,51.28 | VCO1.8 44.13,51.28 | 44.13,48.74 45.09,48.74 | 44.13,46.2 45.09,46.2 | VCO1.6 44.13,46.2 | 44.45,43.66 44.13,43.66 | VCO1.5 44.13,43.66 | VCO1.4 42.23,39.85 | VCO1.3 39.69,39.85 | 31.94,46.2 31.91,46.2 | 31.91,43.66 30.96,43.66 | 1.91,45.72 v4.13,45.72 | IC11.2 26.35,51.28 | 44.13,48.74 v44.13,47.47 44.13,46.2 | 20.95,43.66 21.59,43.66 | 8.41,46.2 7.46,46.2 | 44.45,43.66 45.09,43.66 | 31.91,46.2 30.96,46.2 | v52.7,71.75 v52.7,69.22 v52.7,66.67 v52.7,64.14 v52.7,61.59 v52.7,59.05 v52.7,56.52 v52.7,53.98 v52.7,51.44 v52.7,48.9 v52.7,46.35 v52.7,43.81 v52.7,41.27 v52.7,38.73 v50.8,38.73 v48.58,38.73 v46.04,38.73 43.81,40.96 v43.34,40.96
  Top 0.2: 1.91,45.72 v1.91,46.35 v1.91,48.9 v1.91,51.44 v1.91,53.98 v1.91,56.52 v1.91,59.05 | v1.91,59.05 v1.91,61.59 v1.91,64.14 v1.91,66.67 v1.91,69.22 | v1.91,69.22 v1.91,71.75 | v13.81,64.93 v13.81,63.82 v13.81,62.55 v13.81,61.28 v13.81,60.01 v12.7,60.01 11.91,60.01 v11.91,59.05 v9.84,59.05 v7.3,59.05 v4.6,59.05 v1.91,59.05 | 36.35,53.15 36.35,54.29 | VCO1.11 36.35,53.15 | VCO1.11 34.92,53.15 | C14.2 17.94,15.56 19.2,14.3 v19.2,13.9 | v46.83,7.46 44.2,4.83 R12.1 | 31.91,51.28 v28.57,51.28 IC11.2 | 43.02,64.93 v41.75,64.93 C37.2 | C37.2 40.66,65.56 40.64,65.56 40.64,64.93 | C37.2 40.64,64.93 | 40.64,64.93 40.01,64.93 | 41.34,53.18 40.32,53.18 | 36.35,53.15 37.31,53.15 | 36.26,72.35 C43.2 | C43.2 C44.2 | C44.2 32.54,73.89 | 32.54,73.89 C45.2 | C42.1 21.43,73.89 C41.1 | C41.1 C40.1 | C40.1 17.84,72.35 | C43.2 34.29,73.03 | C43.2 34.29,71.6 | C44.2 31.91,72.35 | C44.2 32.54,71.75 | C45.2 30.48,74.61 | C45.2 30.48,73.18 | C42.1 23.5,74.61 | C42.1 23.5,73.18 | C41.1 22.07,72.35 | C41.1 21.43,71.75 | C40.1 19.68,73.03 | C40.1 19.68,71.75 | 41.34,73.66 41.34,73.5 v40.32,73.5 v40.32,72.23 v40.32,70.96 v40.32,69.85 v40.32,68.74 v40.32,67.79 v40.32,66.83 v40.32,66.04 v41.59,66.04 43.02,66.04 43.02,64.93 | 32.54,73.89 32.54,74.3 v34.13,74.3 | v39.21,67.79 v38.1,67.79 v36.83,67.79 v35.24,67.79 v33.81,67.79 33.5,67.47 C55.1 | C45.2 27.62,73.89 | 27.62,73.89 C42.1 | 12.7,53.02 VCO2.11 | VCO2.11 12.76,54.45 v13.81,54.45 v13.81,55.56 v13.81,56.52 13.44,56.52 R26.2 | v10.16,67.79 v11.91,67.79 T3.4 v13.34,67.79 v14.61,67.79 T3.2 | v16.83,66.04 17.16,66.04 C39.2 | v16.83,63.82 17.16,63.82 | C39.2 17.78,64.93 | v1.91,69.22 v4.6,69.22 v7.3,69.22 v10.48,69.22 10.48,71.75 v11.91,71.75 12.76,71.75 12.76,73.66
  Top 0.2: 17.84,53.18 16.83,53.18 | 27.62,73.89 27.62,67.79 v26.99,67.79 v23.45,67.3 19.05,67.79 | 12.7,53.15 11.43,53.15 | VCO1.13 31.91,51.28 | C39.2 16.51,64.93 | 12.7,53.02 12.7,53.15 | 33.81,36.35 34.13,36.67 36.35,36.67 36.67,36.35 C22.2 | C8.2 43.57,31.52 JP2.6 | C55.1 C48.1 | C55.1 C58.1 | C57.1 C52.1 | C51.1 22.53,61.97 IC13.2 25.24,61.97 25.24,62.07 | C56.1 C51.1 | C56.1 20.12,62.12 19.05,63.18 | VCO1.12 33.72,57.24 32.38,58.58 | 19.05,67.79 v16.83,67.79 | C58.1 31.48,64.41 | C58.1 32.23,65.09 | C58.1 32.23,63.66 | C55.1 33.5,63.82 | C48.1 34.77,65.09 | C48.1 34.77,63.82 | 32.38,58.58 32.38,57.41 IC13.12 29.21,57.41 | 32.38,58.58 32.38,58.72 IC13.14 29.05,58.72 | C51.1 22.38,62.87 | C51.1 22.38,61.59 | C56.1 21.11,61.59 | C56.1 21.11,62.71 | VCO2.4 v20.48,40.96 20.64,41.12 VCO2.5 | 17.84,53.18 17.84,54.23 17.78,54.29 | R44.2 19.8,55.88 | R44.2 19.05,55.09 | R44.2 20.48,55.09 | 17.16,63.82 C39.2 | 17.16,63.82 17.16,63.77 | 19.05,67.79 19.05,63.18 | R26.2 13.44,59.53 13.49,59.53 | R26.2 14.13,58.74 | R26.2 12.7,58.74 | 21.32,53.23 C57.1 | 21.27,53.18 21.32,53.23 | 21.27,53.18 21.32,53.18 21.32,53.23 | 19.8,53.23 R44.2 | 17.84,53.18 19.8,53.18 | 19.84,53.18 19.8,53.23 | 19.8,53.18 19.84,53.18 | C52.1 20.64,55.88 | C52.1 21.32,56.58 | C52.1 22.07,55.88 | C57.1 20.64,54.45 | C57.1 22.07,54.45 | 19.05,63.18 18.26,63.18 18.26,60.12 | 18.26,60.12 16.83,60.12 v16.83,59.85 | 18.26,60.12 18.26,59.37 | 18.26,60.12 19.05,60.12 | VCO2.11 12.7,53.15 | 40.64,64.93 40.64,58.76 | 40.64,58.76 R22.2 | R22.2 40.66,58.12 | R22.2 41.27,58.74 | 40.64,58.76 40.62,58.74 | R22.2 40.62,58.74 | 40.62,58.74 40.01,58.74 | R41.2 31.94,55.09 31.94,52.7 | R41.2 35.08,55.09 | R41.2 34.49,54.45 | R41.2 34.49,55.72
  Top 0.2: C48.1 35.99,64.41 R31.2 | R31.2 35.99,61.12 | R31.2 36.67,61.87 | R31.2 35.24,61.87 35.24,61.75 | 20.64,53.18 21.27,53.18 | 19.8,53.18 19.8,53.23 | 19.84,53.18 20.64,53.18 | VCO2.11 13.94,53.15 | v43.34,40.96 VCO1.4 | 3.65,21.72 C18.2 | v30.32,18.26 31.43,17.14 31.43,13.97 30.96,13.49 v29.84,13.49 | T5.2 25.29,11.32 25.72,11.75 v29.05,11.75 30.89,11.75 R48.2 | v43.34,40.96 44.13,41.75 VCO1.5 | 14.13,23.18 IC3.5
  Top 0.5: IC4.1 IC4.8 37.15,29.37 38.1,28.42 38.1,26.19 37.62,25.72 37.62,20 35.08,17.46 R2.2 35.08,15.88 33.66,14.45 33.66,10.64 v33.34,10.32 v33.34,6.51 | C16.2 16.03,17.62 15.49,18.17 C5.2 12.47,18.17 12.06,18.57 R6.2 C17.2 | 38.35,5.57 C4.2 | C16.2 17.07,20.07 16.51,20.64 | 16.51,20.64 16.83,20.95 16.83,22.86 16.51,23.18 14.13,23.18 13.34,23.97 13.34,25.4 12.48,26.25 11.5,26.25 10.48,27.27 v10.48,27.78 10.48,29.84 v14.45,33.81 C20.2 17.67,25.2 19.68,23.18 IC3.4 | C18.2 6.23,19.77 C15.2 C17.2 | C16.2 C14.2 17.3,15.33 17.3,13.55 C1.2 | 16.51,20.64 IC3.7 | C17.2 C11.2 | C6.2 7.94,9.21 8.73,10 10.79,10 | C2.2 13.81,6.35 13.49,6.67 C10.2 13.49,9.21 12.7,10 10.79,10 | 10.79,10 IC1.2 | 36.26,72.35 JP5.1 34.45,76.3 | 17.84,72.35 JP6.3 19.84,76.3 | 43.18,76.3 JP5.3 41.34,73.66 | 12.76,73.66 JP6.1 10.95,76.3 | v50.48,24.77 50.44,24.77 | JP1.4 3.65,21.72 | T5.2
  Top 0.8: v22.23,2.38 12.06,2.38 7.94,6.51 C6.2 6.58,8.34 5.4,9.53 5.4,15.72 JP1.4 1.91,19.21 v1.91,35.88 v1.91,38.73 | 45.24,19.21 45.72,19.68 45.72,22.86 45.09,23.5 40.48,23.5 39.85,24.13 R4.2 | C8.2 C7.2 46.04,26.83 | 45.24,19.21 IC2.2 43.5,19.21 43.02,18.73 v43.02,17.78 43.02,7.3 41.29,5.57 38.35,5.57 C3.2 v37.31,5.56 | 50.44,24.77 C13.2 46.72,26.15 46.04,26.83 | v51.12,16.35 48.1,16.35 45.24,19.21 | 46.04,26.83 v46.04,38.73
  Top 0.965: v40.32,67.79 v39.21,67.79 | v16.83,67.79 v15.72,67.79
  Bottom 0.2: v14.45,33.81 R39.2 | IC8.6 30.16,11.27 29.69,10.79 29.69,8.41 30.64,7.46 v46.83,7.46 47.91,7.46 49.92,9.47 R19.2 R11.1 C23.1 C24.2 R10.2 49.92,24.22 | 48.58,25.56 49.92,24.22 | 48.58,25.56 43.97,25.56 42.77,24.36 R18.2 42.55,21.2 IC9.4 42.55,18.26 v43.02,17.78 | C31.2 30.09,19.12 30.32,18.89 | IC8.6 33.74,11.27 C28.2 33.97,10.95 v33.34,10.32 | IC8.6 IC8.5 30.16,12.54 29.84,12.86 v29.84,13.49 29.05,12.7 v29.05,11.75 | IC6.14 19.05,23.18 17.78,21.91 | IC6.1 IC6.2 17.78,21.91 | 17.78,21.91 17.3,22.38 14.45,22.38 13.97,21.91 IC6.5 13.97,18.26 13.02,17.3 v13.02,16.67 C26.2 | 33.81,31.91 33.81,31.27 33.43,30.89 IC5.21 33.43,23.03 C21.2 33.11,18.34 32.7,17.94 30.64,17.94 v30.32,18.26 | IC5.5 34.2,32.29 33.81,31.91 | 33.81,31.91 33.02,31.91 32.65,32.28 IC5.3 | v17.78,43.66 17.78,42.86 v17.78,42.23 17.78,41.27 v17.46,40.96 17.46,39.37 v16.83,38.73 v14.76,38.73 v12.56,38.73 v11.11,38.73 v9.53,38.73 9.53,39.05 9.01,39.56 D5.1 | C33.2 C35.2 | C35.2 1.91,53.5 v1.91,53.98 | C33.2 1.91,51.12 v1.91,51.44 | C35.2 3.1,54.61 | C35.2 3.81,53.5 | C33.2 3.81,51.12 | C33.2 3.1,50.01 | v4.13,45.72 4.13,43.5 | v10.48,27.78 10.48,28.96 C25.2 | C60.1 C59.1 | C59.1 23.34,48.74 23.27,48.66 C64.2 | C60.1 27.82,51.28 v28.57,51.28 | C60.1 27.15,50.16 | C60.1 28.42,50.16 | C59.1 28.42,48.74 | C59.1 27.82,48.1 | C64.2 23.97,47.15 | C64.2 23.27,43.38 C63.1 | C63.1 24.29,44.13 | C63.1 24.29,43.34 | 24.29,43.34 25.08,43.34 25.08,43.81 26.83,43.81 IC14.2 26.83,41.75 | 24.29,43.34 24.29,42.7 | v10.16,67.79 v11.91,67.79 v13.34,67.79 v14.61,67.79 v15.72,67.79 v16.83,67.79 v16.83,66.83 v16.83,66.04 v16.83,63.82 v16.83,62.87 v16.83,61.91 v16.83,60.96 v16.83,59.85 v16.83,58.74 v16.83,57.63 v16.83,56.52 16.83,51.91 v16.51,51.59
  Bottom 0.2: 49.92,24.22 50.47,24.77 v50.48,24.77 | 23.97,55.56 23.45,56.08 C53.2 | X1.4 30.79,57.58 C54.1 | 23.97,55.56 23.97,54.29 23.86,53.18 | v26.99,67.79 27.46,67.31 | C54.1 32.38,56.83 | C54.1 33.02,57.58 33.02,57.47 | 30.32,58.1 30.32,57.15 | X1.4 30.32,58.1 | X1.4 28.73,58.1 | 30.32,58.1 30.32,59.05 | 23.97,55.56 23.97,56.67 | C53.2 21.91,56.83 | 21.91,55.4 C53.2 | v24.92,23.65 23.9,23.65 R38.2 C61.2 | R46.2 49.3,26.28 48.58,25.56 | R14.2 C27.2 19.05,9.28 IC7.1 19.05,13.75 v19.2,13.9 | v25.56,13.49 IC8.4 | v48.58,38.73 49.25,39.41 D6.1 | D6.1 49.25,42.83 | D6.1 v50.96,41.27 | D6.1 v47.62,41.27 | D5.1 7.87,41.27 | D5.1 9.01,42.98 | D5.1 10.48,41.27 | v1.91,35.88 1.94,35.91 S2.2
  Bottom 0.5: 19.37,42.86 19.37,44.45 | 17.78,42.86 19.37,42.86 | 19.37,42.86 19.37,41.43 | 19.37,42.86 20.64,42.86 | JP5.3 43.34,76.3 | JP5.3 JP5.1 | JP5.1 36.26,73.66 | JP5.1 34.29,76.3 | JP5.3 41.34,73.66 | 27.46,67.31 IC12.6 27.46,64.93 | JP6.1 JP6.3 | JP6.3 19.68,76.3 | JP6.1 10.79,76.3 | JP6.1 12.76,73.66 | JP6.3 17.84,73.66 | v30.32,18.26 30.32,18.89
  Bottom 0.8: v50.48,24.77 51.12,24.13 v51.12,16.35 | v22.23,2.38 24.77,2.38 28.89,6.51 v33.34,6.51 36.35,6.51 v37.31,5.56
  other vias: 17.78,47.47 16.83,49.21 15.24,47.47 47.62,56.52 50.16,56.52 45.09,56.52 40.01,48.74 38.73,50.01 36.2,48.74 46.04,50.16 7.78,76.83 26.99,76.83 36.2,43.66 37.15,42.23 40.01,43.66 41.75,45.24 50.16,43.81 50.16,46.35 47.62,46.35 47.62,43.81 46.04,45.09 46.04,47.62 40.01,46.2 38.26,44.77 38.26,47.47 41.75,47.47 36.2,46.35 38.26,38.73 40.96,38.73 43.5,38.73 29.05,41.12 30,40.01 34.92,39.53 46.04,43.18 28.89,46.04 28.89,43.81 47.62,48.9 50.16,48.9 50.16,51.44 42.86,46.2 47.62,53.98 50.16,53.98 47.62,51.44 46.04,52.7 45.09,53.98 43.02,55.24 45.09,59.05 47.62,59.05 50.16,59.05 50.16,66.67 47.62,66.67 45.09,66.67 45.09,69.22 47.62,69.22 50.16,69.22 50.16,64.14 50.16,61.59 47.62,61.59 45.09,64.14 45.09,61.59 47.62,64.14 43.02,62.87 43.02,67.94 41.75,69.22 43.02,70.48 41.59,63.82 28.42,59.37 27.3,61.16 27.3,62.87 34.13,66.36 35.88,66.04 37.31,62.55 37.31,63.82 37.31,64.93 37.31,66.04 37.31,61.28 37.31,60.01 37.31,58.9 37.31,57.78 37.31,56.67 40.32,55.72 40.32,56.67 41.43,57.78 40.32,57.78 41.75,58.74 41.43,59.85 40.32,59.85 18.41,66.83 18.41,69.22 20.32,69.22 22.07,69.22 20.32,66.83 20.32,64.93 18.41,64.93 19.37,63.82 26.99,70.17 25.08,69.22 16.83,68.74 16.83,69.75 11.91,69.53 10.48,66.36 11.91,66.04 13.81,66.04 11.91,64.14 9.84,64.14 7.3,64.14 7.3,66.67 16.83,73.5 16.83,72.65 16.83,71.86 18.41,71.75 19.84,75.56 19.84,76.83 22.38,76.83 19.84,74.3 19.21,73.5 10.64,76.83 10.64,75.56 10.64,74.3 11.43,73.5 13.81,73.5 13.81,72.55 13.81,71.6 13.81,70.64 9.84,71.75 8.1,74.3 7.3,71.75 40.32,54.61 34.61,60.64 40.32,63.82 40.32,62.55 35.88,63.82 40.32,61.28 19.37,62.07 19.37,60.96 11.91,61.59 9.84,61.59 7.3,61.59 4.6,61.59 4.6,64.14 4.6,66.67 4.6,71.6 13.81,69.53 9.84,54.61 11.49,53.18 11.91,56.52 13.81,57.63 12.7,57.63 9.84,56.52 4.6,56.52 7.3,56.52 7.3,53.5 4.6,51.12 13.97,49.21 15.4,50.32 4.6,53.5 13.97,46.2 12.7,47.47 16.83,45.88 24.92,41.22 23.34,41.91 23.34,49.69 24.92,47.15 24.92,49.69 29.36,53.24 19.37,51.28 24.92,76.83 29.05,76.83 31.59,76.83 34.13,76.83 34.13,75.56 37.31,73.5 35.08,73.5 43.34,74.3 43.34,76.83 45.09,76.83 46.83,76.83 46.51,74.3 45.09,74.3 45.09,71.75 43.02,72.87 41.75,71.6 37.31,69.53 35.88,69.53 32.38,68.74 34.13,69.22 37.31,71.91 29.05,74.3 31.91,74.3 26.99,74.3 24.92,74.3 22.07,74.3 28.89,69.22 50.16,71.6 47.62,71.75 43.34,75.56 4.45,43.02 6.03,42.39 6.03,40.64 3.49,40.64 6.67,46.2 8.1,38.73 19.33,46.18 18.73,38.73 20.48,38.73
  pour Top: 1,79 54,79 54,38 1,38
  pour Bottom: 1,79 54,79 54,38 1,38
IN  (via drill 0.33)
  Top 0.2: JP3.2 v4.76,40.64
  Bottom 0.2: IC10.3 3.18,43.02 4.76,41.43 v4.76,40.64
  Bottom 0.406: IC10.3
LE  (via drill 0.33 pad 0.25)
  Top 0.2: IC13.18 30.08,61.28 31.27,61.28 v31.57,61.58
  Bottom 0.2: IC5.12 39.12,29.27 39.69,29.84 39.69,34.61 35.56,38.73 34.61,38.73 31.11,42.23 31.11,45.24 31.59,45.72 31.59,52.23 34.45,55.09 34.45,59.21 32.38,61.28 32.09,61.58 v31.57,61.58
  Bottom 0.5: IC5.12
LOWBATT  (via drill 0.33)
  Top 0.2: R1.2 R2.1 35.08,14.61 36.35,15.88 36.35,17.46 38.42,19.53 38.42,23.18 v38.73,23.5
  Bottom 0.2: IC5.19 34.98,21.69 35.24,21.43 36.67,21.43 v38.73,23.5
  Bottom 0.5: IC5.19
MISO
  Bottom 0.2: IC5.16 47.9,26.15 48.74,26.99 48.74,30.8 | 48.74,30.8 44.13,35.4 42.23,35.4 JP2.1 | 48.74,30.8 49.53,31.59 49.53,35.56 49.88,35.91 S1.1
  Bottom 0.5: IC5.16
MOSI
  Bottom 0.2: IC5.15 43.55,26.94 43.81,26.67 47.78,26.67 48.26,27.15 48.26,29.37 JP2.4
  Bottom 0.5: IC5.15
N$1  (via drill 3)
  other vias: 4.6,4.6
N$2  (via drill 3)
  other vias: 50.01,4.6
N$49  (via drill 0.33)
  other vias: 4.6,48.74
N$137  (via drill 0.33)
  other vias: 30.48,72.39
N$138  (via drill 0.33)
  other vias: 23.5,72.39
N$172  (via drill 3)
  other vias: 4.6,75.09
N$173  (via drill 3)
  other vias: 50.01,75.09
N$178  (via drill 0.33)
  other vias: 30.8,54.13
N$180  (via drill 0.33)
  other vias: 30.48,67.63
OSCIN  (via drill 0.33)
  Top 0.2: IC13.8 22.42,58.06 v21.91,58.58
  Bottom 0.2: X1.1 23.45,57.58 C53.1 v21.91,58.58
OUT
  Bottom 0.2: IC6.13 17.78,27.62 18.26,28.1 19.37,28.1 20,27.46 20,19.84 | 20,19.84 19.37,19.21 16.99,19.21 16.51,19.68 IC6.3 | 20,19.84 20.64,19.21 25.08,19.21 25.4,18.89 25.4,15.24 27,13.64 27,11 26,10 IC8.2 IC8.1
OUTA  (via drill 0.33)
  Top 0.2: 23.41,66.04 R29.2
  Top 0.5: v22.23,66.04 23.41,66.04
  Bottom 0.5: v22.23,66.04 IC12.8
OUTB  (via drill 0.33)
  Top 0.2: 30.57,66.04 R28.2
  Top 0.5: v31.75,66.04 30.57,66.04
  Bottom 0.5: IC12.5 v31.75,66.04
PCI12/ADC4/SDA/PC4
  Bottom 0.2: IC5.27 28,27.72 23.18,32.54 11.11,32.54 8.89,30.32 8.89,23.18 9.68,22.38 R15.1
PCI13/ADC5/SCL/PC5  (via drill 0.33)
  Top 0.2: v20.48,33.81 20.48,35.08 20.87,35.47 C62.1 20.87,37.7 22.07,38.89 22.07,51.28 25.6,54.81 R37.2 25.6,56.24 27.62,58.26 27.62,59.53 27.14,60.02 26.65,60.5 25.7,60.5 25.21,60.02 IC13.5
  Bottom 0.2: IC5.28 28,28.51 22.7,33.81 v20.48,33.81 R39.1
PCI23/AIN1/PD7  (via drill 0.33)
  Top 0.2: D4.1 34.95,2.54 30.16,2.54 29.21,3.49 29.21,4.13 32.54,7.46 32.54,10.79 33.02,11.27 33.02,16.51 36.83,20.32 v36.83,27.66
  Bottom 0.2: v36.83,27.66 36.83,29.53 37.36,30.06 38,30.06 IC5.11
  Bottom 0.5: IC5.11 38,30.06
PIN3
  Top 0.2: L6.1 38.8,70.8 | T2.3 C47.1 38.96,71.96 39,72 39,71.37 L6.1 | L6.1 38.42,70.8
RESET  (via drill 0.33)
  Top 0.2: C22.1 R7.2 39.92,32.63 JP2.5 | v44.77,30.48 44.77,37.15 44.13,37.78 29.21,37.78 27.93,36.5 25.35,36.5 24.16,35.31 v24.16,34.98
  Bottom 0.2: IC5.29 28.19,29.27 26.83,30.64 26.83,32.54 24.4,34.98 v24.16,34.98 | v44.77,30.48 42.07,30.48 JP2.5
SCK  (via drill 0.33)
  Top 0.2: v36.45,31.43 37.94,31.43 39.05,30.32 41.43,30.32 42.23,31.11 42.23,32.86 JP2.3
  Bottom 0.2: IC5.17 36.56,25 36.56,26.63 36.2,26.99 35.8,27.39 35.8,27.65 36.2,28.05 36.2,31.19 v36.45,31.43
  Bottom 0.5: IC5.17 36.56,25
SDI
  Bottom 0.2: IC5.25 27.51,26.15 22.38,31.27 12.86,31.27 11.75,30.16 11.75,27.78 11.43,27.46 IC6.8
SIG$8
  Top 0.5: R6.1 12.29,23 | IC3.8 14.13,19.37 13.49,20 13.49,22.38 13.11,22.77 R6.1 | R5.2 11.82,23.02 R6.1
SIG$18
  Bottom 0.2: IC5.13 43.59,28.51 43.81,28.73 46.67,28.73 46.99,28.42 R8.1
  Bottom 0.5: IC5.13
SIG$19
  Bottom 0.2: R9.1 38.14,27.69 IC5.14
  Bottom 0.5: IC5.14
SIG$20
  Top 0.2: D4.2 R12.2
SIG$22
  Bottom 0.2: IC5.30 28.36,30.06 27.3,31.11 27.3,33.18 24.77,35.72 6.83,35.72 5.4,34.29 5.4,14.13 JP1.2
  Bottom 0.5: IC5.30
SIG$30
  Bottom 0.2: R13.2 20.64,5.71 19.84,4.92 16.67,4.92 16.28,5.31 R14.1 13.97,6.35 13.33,6.99 T1.1
SIG$31
  Bottom 0.2: T1.2 11.43,11.9 9.68,13.65 R15.2
SIG$34
  Bottom 0.2: C30.1 20.16,17.94 19.68,18.41 16.51,18.41 15.24,19.68 IC6.4
SIG$35
  Bottom 0.2: IC6.12 16.51,28.73 17.78,30 21.11,30 22.54,28.57 22.54,20.95 23.02,20.48 31.75,20.48 32,20.23 C29.1
SIG$37
  Bottom 0.2: C29.2 35,20.23 35.56,20.8 36.67,20.8 38.58,22.7 40.64,22.7 41.27,22.07 IC9.3 41.27,18.1 42.39,16.99 43.81,16.99 44.45,17.62 R17.1
SIG$39
  Bottom 0.2: 37.08,14.92 40.8,14.92 41.27,14.45 IC9.6 41,13.22 41,13 41.78,12.22 45.72,12.22 46.35,12.86 R19.1
  Bottom 0.406: R20.2 37.08,14.84 37.08,14.92
SIG$40
  Bottom 0.2: IC9.2 40.01,21.2 R18.1 37.94,21.43 37.15,20.64 R21.2
SIG$41  (via drill 0.33)
  Top 0.2: VCO2.2 v13.65,39.69 13.65,38.26 13.97,37.94 18.57,37.94 19.53,36.99 19.53,32.63 18.58,31.68 v18.58,28.89
  Bottom 0.2: IC9.1 38.73,17.46 38.19,16.91 R21.1 31.98,16.91 31.43,17.46 29.69,17.46 27.3,19.84 22.38,19.84 21.27,20.95 21.27,27.94 20.32,28.89 v18.58,28.89 | v13.65,39.69 13.65,40.84 D5.2
SIG$42  (via drill 0.33)
  Top 0.2: v48.58,10.32 50.64,10.32 52.7,12.38 52.7,27.94 v48.58,32.07 | v37.15,39.69 VCO1.2
  Bottom 0.2: v48.58,32.07 45.09,35.56 45.09,41.12 | v37.15,39.69 43.66,39.69 45.05,41.08 | 45.09,41.12 45.09,41.24 D6.2 45.05,41.08 | 45.09,41.12 45.05,41.08 | v48.58,10.32 48.55,10.35 42.35,10.35 40.01,12.7 IC9.7 40.01,12.65 39.15,11.8 37.02,11.8 R20.1
SIG$44
  Top 0.2: 30.07,48.7 L5.1 C32.1
  Top 0.3: 30.07,48.7 VCO1.14 | C34.1 C32.1
  Top 0.406: VCO1.14
SIG$45
  Top 0.2: IC11.4 29.05,50.32 28.57,49.85 28.57,48.9 27.94,48.26 L5.2
SIG$46
  Bottom 0.2: IC10.4 3.17,48.74 L4.2
  Bottom 0.406: IC10.4
SIG$48
  Top 0.2: IC11.3 26.35,50.33 25.72,49.69 25.72,42.7 26.99,41.43 JP4.2
SIG$51
  Top 0.2: T3.1 15.66,65.93 C39.1 15.3,64.93 C38.2
SIG$52  (1 unrouted)
  Top 0.2: 39.1,64.93 38.8,64.93 | T2.1 39.16,65.92 C37.1 38.8,64.57 C36.2
SIG$55
  Top 0.2: C46.1 15.65,71.61 L7.1 15.3,70.8 T3.3
SIG$56
  Top 0.2: L7.2 17.16,70.85 | C41.2 21.43,70.89
  Top 0.5: 17.16,70.85 C40.2 C41.2 | 21.43,70.89 C42.2 R29.1
SIG$57  (1 unrouted)
  Top 0.2: C43.1 34.29,70.8 | 30.48,70.85 C45.1
  Top 0.5: 34.29,70.8 36.92,70.8 | C43.1 C44.1 30.48,70.85 R28.1
SIG$62  (via drill 0.33)
  Top 0.2: IC13.19 28.94,61.97 v28.58,61.61
  Bottom 0.2: IC5.9 38.11,34.28 34.92,37.47 34.29,37.47 30.16,41.59 30.16,45.56 30.64,46.04 30.64,52.7 33.5,55.56 33.5,58.42 32.38,59.53 29.53,59.53 28.73,60.33 28.58,60.48 v28.58,61.61
  Bottom 0.5: IC5.9
SIG$65
  Top 0.2: IC13.3 22.9,61.31 22.23,60.64 20.48,60.64 19.84,60.01 C49.2
SIG$66
  Top 0.2: C50.2 30.05,59.37 IC13.15
SIG$69
  Top 0.2: IC13.1 24.25,63.23 23.86,63.62 C51.2 C56.2 21.11,64.29 21.43,64.61 R32.2
SIG$70
  Top 0.2: C57.2 C52.2 R33.2 22.92,57.41 IC13.9
SIG$71
  Top 0.2: R34.2 30.12,64.02 31.23,62.91 C58.2 C55.2 33.5,62.07 32.09,60.66 IC13.17
SIG$72  (via drill 0.33)
  Top 0.2: 23.02,59.69 23.34,59.37 IC13.6 v25.71,59.37 v25.72,59.37 | 23.02,59.69 23.02,60.33 23.36,60.66 IC13.4 25.11,60.66 25.83,61.39 R32.1 R34.1 | R37.1 27.1,54.36 R36.1 26.19,54.29 v25.72,53.82 | 23.02,59.69 21.43,59.69 20.95,59.21 20.95,58.26 21.32,57.9 R33.1
  Bottom 0.2: R35.1 C59.2 C60.2 29.32,51.64 27.15,53.82 v25.72,53.82 v25.72,59.37
SIG$73
  Bottom 0.2: IC14.4 24.29,44.97 C63.2
SIG$76
  Top 0.2: C47.2 38.8,74.8 39,75 39,76.09 JP5.2
SIG$77
  Top 0.2: C46.2 JP6.2
SIG$78  (via drill 0.33)
  Top 0.2: v26.67,58.49 25.46,58.49 25.2,58.75 24.28,58.75 IC13.7
  Bottom 0.2: C54.2 30.79,56.08 X1.3 28.73,55.56 26.67,57.63 v26.67,58.49
SIG$79
  Top 0.5: C2.1 11.68,4.67 13.02,3.33 18.41,3.33 19.05,3.97 JP7.2 | C2.1 11.68,8.66 IC1.3 | C2.1 10.64,6.35 9.84,7.14 IC1.1
SIG$80
  Top 0.2: R23.2 38.8,59 | 38.8,59 R24.1 | R22.1 39,58.9 39,59 38.8,59
SIG$81
  Top 0.2: R27.2 14.94,59.37 R26.1 15.3,58.37 R25.1
SIG$82
  Top 0.2: C36.1 R24.2
SIG$83  (1 unrouted)
  Top 0.2: 18.3,56.04 18.26,56.08
  Top 0.8: R43.1 R44.1 18.3,56.04
SIG$84
  Top 0.2: 19.76,57.58 C49.1 19.84,57.58
  Top 0.5: R45.1 19.76,57.58 19.84,57.58
  Top 0.8: R45.1 R30.1
SIG$85
  Top 0.2: R42.2
  Top 0.8: R40.1 R41.1 R42.2
SIG$86
  Top 0.2: C50.1 | R31.1
  Top 0.8: R42.1 C50.1 | C50.1 R31.1
SIG$87
  Top 0.2: C38.1 R27.1
SIG$88
  Bottom 0.2: R46.1 50.8,31.65 S1.2
SIG$90  (via drill 0.33)  (1 unrouted)
  Top 0.2: 30.96,10 R48.1 | 30.96,10 30.48,10.48 T5.1 | 30.96,10 32.54,11.59 32.54,16.99 35.72,20.16 35.72,28.09 v35.4,28.41
  Bottom 0.2: v35.4,28.41 35.4,31.75 35.77,32.12 IC5.7
SW
  Top 0.5: D3.1 27.15,29.37 28.73,30.96 32.54,30.96 32.86,30.64 IC4.7 L3.2
SW1
  Top 0.2: L2.2
  Top 0.5: D2.1 L2.2 15.56,25.88 19.53,21.91 IC3.3
TRIG  (2 unrouted)
  Bottom 0.2: IC7.6 IC7.7 17.78,15.72 18.26,15.24 | C26.1 13.02,11.59 12.38,10.95 T1.3 13.92,9.89 14.61,9.21 14.61,8.57 15.4,7.78 17.14,7.78 17.78,8.41 IC7.2 17.78,14.76 18.26,15.24 | 18.26,15.24 22.07,15.24 24,13.31 24,12 24.73,11.27 IC8.3
VCC  (via drill 0.33)
  Top 0.2: v7.3,48.74 8.41,48.74 VCO2.14
  Top 0.406: VCO2.14
  Bottom 0.2: C35.1 C33.1 L4.1 v7.3,48.74
VCO1_DCADJ
  Bottom 0.2: R16.2 44.93,15.56 45.24,15.24 R11.2 C23.2 48.58,19.12 48.58,24.13 48.01,24.69 R8.2
VCO1_OUT
  Top 0.2: 38.73,53.15 VCO1.10 38.8,55.45 | 38.8,55.45 R40.2 | 38.8,55.45 R23.1
VCO2_DCADJ
  Bottom 0.2: R10.1 C24.1 44.77,20.32 44.45,20.64 R17.2 44.45,21.5 44.45,22.7 45.09,23.34 R9.2
VCO2_OUT
  Top 0.2: R25.2 15.3,55.44 R43.2 15.3,55.09 VCO2.10
VIN  (via drill 0.33 pad 0.25)
  Top 0.2: R1.1 35.08,5.8 C3.1
  Top 0.5: 40.32,15.56 L1.1 40.32,11.11 | 27.78,25.72 L3.1 | IC4.2 32.86,33.34 31.75,32.23 26.23,32.23 25.24,31.24 25.24,28.26 | IC3.2 19.68,20.64 19.05,20 19.05,17.94 19.37,17.62 C16.1 C14.1 20.07,13.42 23.02,10.48 23.02,7.62 22.54,7.14 | IC3.2 IC3.1 | IC3.2 22.07,20.64 22.38,20.95 22.38,23.97 20.64,25.72 L2.1 20.8,28.26 25.24,28.26 | C4.1 41.35,9.45 40.32,10.48 40.32,11.11 | 39.69,10.48 40.32,11.11 | JP7.1 C1.1 20.06,7.88 20.8,7.14 22.54,7.14 | T4.3 23.95,3.99 22.54,5.4 22.54,7.14 | 25.24,28.26 25.24,27.76 26,27 26.5,27 27.78,25.72 | IC4.6 31.59,28.59 31,28 30.06,28 27.78,25.72
  Top 0.7: IC2.4 IC2.5 41.75,16.99 40.32,15.56
  Top 0.8: 39.69,10.48 38.58,10.48 36.99,8.89 36.99,6.99 35.56,5.56 C3.1 34.56,5.56 34,5 31.35,5 31.18,4.82 | 31.18,4.82 v30.32,3.97 31.18,4.82 | v28.1,3.97 25.9,3.97 T4.3 | 31.18,4.82
  Bottom 0.8: v28.1,3.97 v30.32,3.97
VOUT
  Bottom 0.2: C64.1 R35.2 27.82,44.97 IC14.5
(copper drawn outside any net)
  shapes: Bottom area x4, Bottom circle x4, Top area x30, Top circle x2

## Text on the board
tPlace: 1 | 2 | 3 | 1 | 2 | 3 | TOP | 1 | 2 | 3
bPlace: BOTTOM